# Altium PCB POLLUTAG.PcbDoc
Units mm, origin at the board's own origin, x right, y up, seen from the top; angles counter-clockwise.
Board outline 175 x 81 mm, 2 copper layers (Top Layer, Bottom Layer), stack 1.471 mm thick; 41 components, 28 nets, 141 pads, 0 vias.
Unrouted connection lines stored in the file: 90.
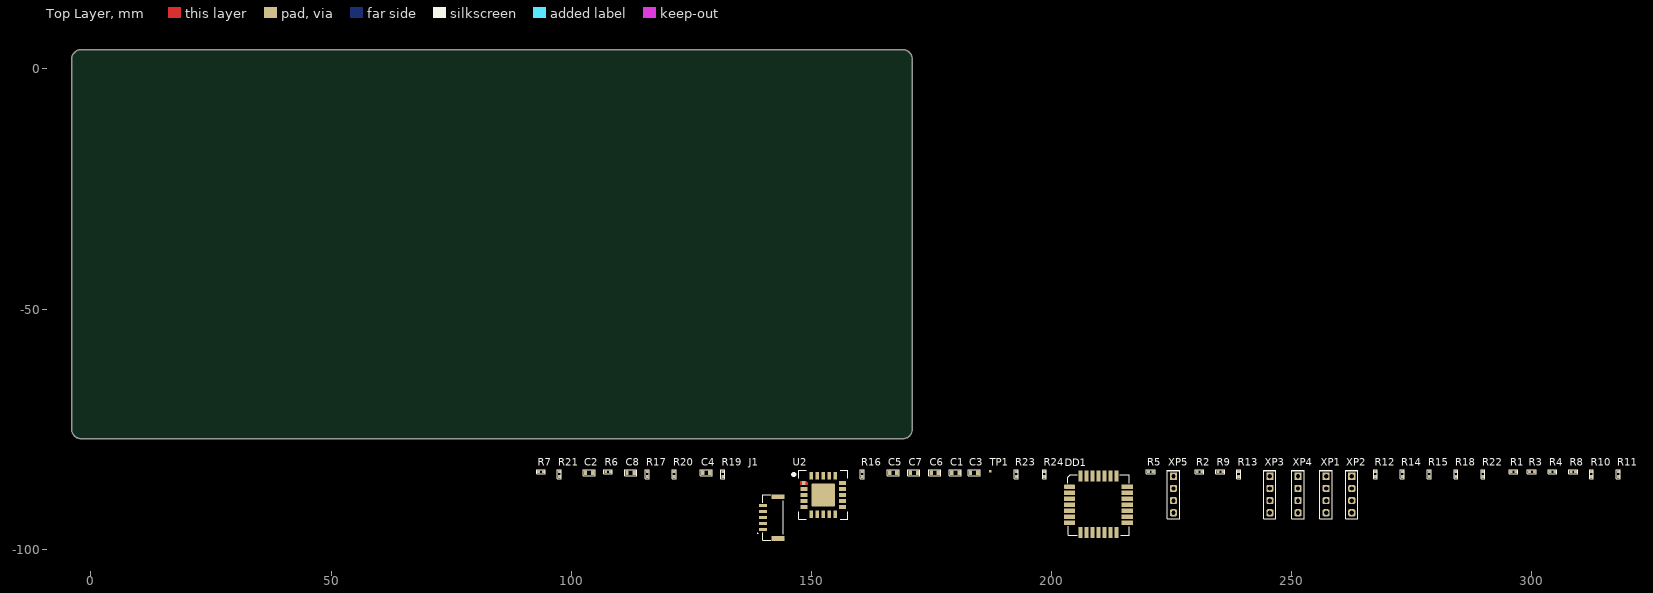
[diagram p0: Top Layer view]
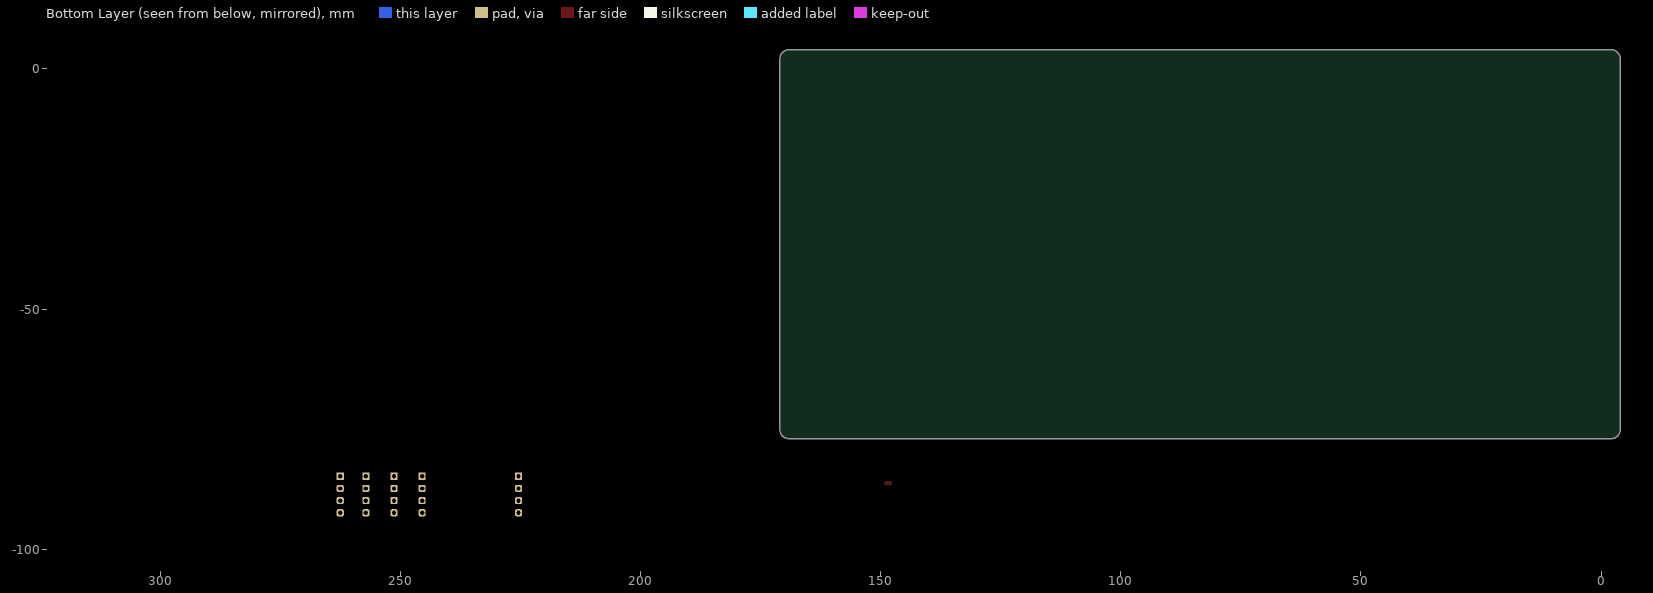
[diagram p1: Bottom Layer view, seen from below]

## Layer stack, top to bottom
Top Solder: solder mask 0.0102, Solder Resist, Dk 3.5
Top Layer: signal copper 0.0356
Dielectric 1: dielectric 1.4, FR-4, Dk 4.8
Bottom Layer: signal copper 0.0356
Bottom Solder: solder mask 0.0102, Solder Resist, Dk 3.5

## Board outline
-2,-77 cw(c-2,-75) -4,-75 -4,2 cw(c-2,2) -2,4 169,4 cw(c169,2) 171,2 171,-75 cw(c169,-75) 169,-77

## Design rules (kind name [scope] priority, off if disabled: settings)
Clearance Clearance_1 [InPolygon] p1: gap=0.25 ignorepadtopadclearanceinfootprint=FALSE except(0: Arc-Hole Track-Hole SMDPad-Hole THPad-Hole Via-Hole Fill-Hole Poly-Hole Region-Hole Text-Hole)
Clearance [All] p2: gap=0.152 ignorepadtopadclearanceinfootprint=FALSE except(0: Arc-Hole Track-Hole SMDPad-Hole THPad-Hole Via-Hole Fill-Hole Poly-Hole Region-Hole Text-Hole)
HoleSize [All] p1: absolutevalues=TRUE maxlimit=10 minlimit=0.025 maxpercent=80.000 minpercent=20.000
HoleToHoleClearance [All] p1: gap=0.2 allowstackedmicrovias=TRUE
MinimumSolderMaskSliver [All] p1 off: minsoldermaskwidth=0.254
PlaneClearance [All] p1: clearance=0.25
PolygonConnect [(InNet('AVDD_DISP') AND IsPolygon)] p1: connectstyle=Direct reliefconductorwidth=0.254 reliefentries=4 polygonreliefangle="90 Angle" airgapwidth=0.254
PolygonConnect TOP_NETDA2-14 [InNamedPolygon('NETDA2-14')] p2: connectstyle=Direct reliefconductorwidth=0.254 reliefentries=4 polygonreliefangle="90 Angle" airgapwidth=0.254
PolygonConnect Bottom_GND [isVia vs InNet('GND')] p3: connectstyle=Direct reliefconductorwidth=0.254 reliefentries=4 polygonreliefangle="90 Angle" airgapwidth=0.254
PolygonConnect PolygonConnect_2 [All] p4: connectstyle=Relief reliefconductorwidth=0.254 reliefentries=4 polygonreliefangle="90 Angle" airgapwidth=0.254
PolygonConnect PolygonConnect_1 [isVia] p5: connectstyle=Direct reliefconductorwidth=0.254 reliefentries=4 polygonreliefangle="90 Angle" airgapwidth=0.254
RoomDefinition POLLLUTAG_1 [InComponentClass('POLLLUTAG_1')] p1: confinementstyle=ConfineIn formatcopy=TRUE lockcomponents=FALSE outline 91.514,-106.176 320.4,-106.176 320.4,-83.35 91.514,-83.35
RoutingVias [All] p1: holewidth=0.3 width=0.7 viastyle="Through Hole" minholewidth=0.3 minwidth=0.7 maxholewidth=5 maxwidth=7
SilkToBoardRegionClearance [All] p1 off:
SilkToSilkClearance [All] p1 off: silktosilkclearance=0.254
SilkToSolderMaskClearance [IsPad] p1 off: minsilkscreentomaskgap=0.254 clearancetoexposedcopper=TRUE
SolderMaskExpansion [All] p1: expansion=0.102 istentingtop=FALSE
Width [All] p1: maxlimit=8 minlimit=0.15 preferedwidth=0.2
23 further rules are at their usual default settings.

## Components (designator, comment, footprint, x,y, rotation, side; value= is the part's Value field where it differs from the comment)
C1 "1uF" CAP_0603 179.993,-84.075 r0 top
C2 "1uF" CAP_0603 103.715,-84.075 r0 top
C3 "1uF" CAP_0603 183.868,-84.075 r0 top
C4 "1uF" CAP_0603 128.116,-84.075 r0 top
C5 "15pF" CAP_0603 167.043,-84.075 r0 top value=1uF
C6 "15pF" CAP_0603 175.668,-84.075 r0 top value=1uF
C7 "15pF" CAP_0603 171.343,-84.075 r0 top value=1uF
C8 "1uF" CAP_0603 112.365,-84.075 r0 top
DD1 "LoRa-E5-HF" LCC28_1.25_7X7 203.754,-87.004 r0 top
J1 "SM05B-GHS-TB_LF__SN_" SM05B-GHS-TB 140.091,-93.425 r90 top
R1 "Res_0402" RES_0402 296.649,-83.875 r0 top value=100
R2 "Res_0402" RES_0402 231.321,-83.875 r0 top value=100
R3 "Res_0402" RES_0402 300.474,-83.875 r0 top value=4.7k
R4 "Res_0402" RES_0402 304.774,-83.875 r0 top value=4.7k
R5 "Res_0402" RES_0402 221.145,-83.875 r0 top value=4.7k
R6 "Res_0402" RES_0402 108.19,-83.875 r0 top value=100
R7 "Res_0402" RES_0402 94.214,-83.875 r0 top value=100
R8 "Res_0402" RES_0402 309.1,-83.875 r0 top value=100
R9 "Res_0402" RES_0402 235.621,-83.875 r0 top value=100
R10 "Res_0402" RES_0402 312.4,-83.875 r90 top value=4.7k
R11 "Res_0402" RES_0402 318,-83.875 r90 top value=4.7k
R12 "Res_0402" RES_0402 267.423,-83.875 r90 top value=100
R13 "Res_0402" RES_0402 238.946,-83.875 r90 top value=100
R14 "Res_0402" RES_0402 273.023,-83.875 r90 top value=4.7k
R15 "Res_0402" RES_0402 278.623,-83.875 r90 top value=4.7k
R16 "Res_0402" RES_0402 160.592,-83.875 r90 top value=100
R17 "Res_0402" RES_0402 115.815,-83.875 r90 top value=100
R18 "Res_0402" RES_0402 284.198,-83.875 r90 top value=4.7k
R19 "Res_0402" RES_0402 131.566,-83.875 r90 top value=100
R20 "Res_0402" RES_0402 121.415,-83.875 r90 top value=100
R21 "Res_0402" RES_0402 97.539,-83.875 r90 top value=100
R22 "Res_0402" RES_0402 289.799,-83.875 r90 top value=4.7k
R23 "Res_0402" RES_0402 192.669,-83.875 r90 top value=4.7k
R24 "Res_0402" RES_0402 198.519,-83.875 r90 top value=4.7k
TP1 "JUMPER" "TEST POINT" 187.219,-82.775 r90 top value=JMP
U2 "SCD4x" SCD4X 152.467,-88.7 r0 top
XP1 "LPUART1" CONN_2.54_4 257.147,-84.8 r0 top
XP2 "UART1" CONN_2.54_4 262.497,-84.8 r0 top
XP3 "USART2" CONN_2.54_4 245.446,-84.8 r0 top
XP4 "I2C2" CONN_2.54_4 251.297,-84.8 r0 top
XP5 "SPI2" CONN_2.54_4 225.37,-84.8 r0 top

## Footprints (in the part's own frame and the unit in brackets; to place one, negate y for a bottom-side part, rotate by r counter-clockwise, add the part's x,y. Pads: shape width x height; smd on the part's side, far side on the other; paste and mask are expansions set on the pad)
CAP_0603 [mm]
  rect 0.7x0.9 smd: 1(-0.75,0) 2(0.75,0)
  silkscreen extent -1.25,-0.6 1.25,0.6, body extent -0.8,-0.4 0.8,0.4, height 0.8
CONN_2.54_4 [mm]
  rect 1.5x1.5 hole 0.9: 1(0,0)
  rrect50% 1.5x1.5 hole 0.9: 2(0,-2.54) 3(0,-5.08) 4(0,-7.62)
  silkscreen extent -1.27,-8.89 1.27,1.27
LCC28_1.25_7X7 [mm]
  rrect50% 2.3x0.9 smd: 1(0,0)
  rect 2.3x0.9 smd: 2(0,-1.25) 3(0,-2.5) 4(0,-3.75) 5(0,-5) 6(0,-6.25) 7(0,-7.5) 15(12,-7.5) 16(12,-6.25) 17(12,-5) 18(12,-3.75) 19(12,-2.5) 20(12,-1.25) 21(12,0)
  rect 0.9x2.3 smd: 8(2.25,-9.5) 9(3.5,-9.5) 10(4.75,-9.5) 11(6,-9.5) 12(7.25,-9.5) 13(8.5,-9.5) 14(9.75,-9.5) 22(9.75,2.25) 23(8.5,2.25) 24(7.25,2.25) 25(6,2.25) 26(4.75,2.25) 27(3.5,2.25) 28(2.25,2.25)
  silkscreen extent -0.35,-10.05 12.37,2.5, body extent 0.05,-9.77 12.05,2.23, height 2.6
RES_0402 [mm] "RES and IND"
  rrect20% 0.6x0.6 smd: 1(-1,0) 2(0,0)
  silkscreen extent -1.4,-0.4 0.4,0.4, body extent -1,-0.25 0,0.25, height 0.3
SCD4X [mm] "PQFN, 20-Leads, Body 10.10x10.10mm, Pitch 1.25mm, Thermal Pad 4.80x4.80mm, IPC Medium Density"
  rect 0.8x0.8 smd paste-0.7: 1(-4.075,2.5)
  rrect5% 1.5x0.8 smd paste-0.125: 2(-4,1.25) 3(-4,0) 4(-4,-1.25) 5(-4,-2.5) 11(4,-2.5) 12(4,-1.25) 13(4,0) 14(4,1.25) 15(4,2.5)
  rrect5% 0.8x1.5 smd paste-0.125: 6(-2.5,-4) 7(-1.25,-4) 8(0,-4) 9(1.25,-4) 10(2.5,-4) 16(2.5,4) 17(1.25,4) 18(0,4) 19(-1.25,4) 20(-2.5,4)
  rrect5% 4.8x4.8 smd paste-5 mask+0.1: 21(0,0)
  Top Layer region: -4.75,2.1 -4.75,2.9 -3.5,2.9 -3.25,2.65 -3.25,2.1
  silkscreen extent -6.65,-5.1 5.1,5.1, body extent -5.05,-5.05 5.05,5.05, height 6.28
SM05B-GHS-TB [mm]
  rect 0.6x1.7 smd: 1(-2.5,0.2) 2(-1.25,0.2) 3(0,0.2) 4(1.25,0.2) 5(2.5,0.2)
  rect 1x2.7 smd: 6(-4.35,-3) 7(4.35,-3)
  silkscreen extent -4.75,-4.05 4.75,1.32, body extent -10,-3.38 10,3.38, height 5.8
"TEST POINT" [mm] "TEST POINT"
  rrect40% 0.5x0.5 smd: 1(-1,0)

## Part data
C1 C2 C3 C4 C5 C6 C7 C8: library part Cap_0603, Manufacturer=AVX, Part Number=0603YC105KAT2A, Distributor=http://www.rospek.ru, PackageReference=0603, Price=3.00, Replacement=GRM188R71E105KA12D
DD1: library part "LoRa-E5 Seeed", "LoRa Wireless Module - Powered by STM32WE"
J1: "JST GH Series, 1.25mm Pitch 5 Way Right Angle PCB Header, Solder Termination, 1A", Arrow Part Number=SM05B-GHS-TB(LF)(SN), Manufacturer_Name="JST (JAPAN SOLDERLESS TERMINALS)", Arrow Price/Stock=https://www.arrow.com/en/products/sm05b-ghs-tb-lf-sn/jst-manufacturing, Datasheet Link=https://datasheet.datasheetarchive.com/originals/distributors/Datasheets_SAMA/e4ef010dc292ea31091454f6c0afb63a.pdf, Manufacturer_Part_Number=SM05B-GHS-TB(LF)(SN)
R1 R2 R3 R4 R5 R6 R7 R8 R9 R10 R11 R12 R13 R14 R15 R16 R17 R18 R19 R20 R21 R22 R23 R24: "0402", Manufacturer=BOURNS, Part Number=CR0402-FX-1000GLF, Distributor=http://www.kontest.ru, PackageReference=0402, Price=0.01$, Replacement="0402 100 Ohm 5%"
TP1: library part TEST_POINT_SMALL, "JUMPER 2.54", Manufacturer=TE, Price=0.05$
XP1 XP2 XP3 XP4 XP5: library part CONNECT_SWD

## Nets (pads, with @x,y where several pads share a name; then routed paths per layer and width w, separated by ;. In a path a pad name is that pad's centre, name@x,y a point inside that pad or via, vN(x,y) a via of type N, cw(c..) or ccw(c..) an arc to the next point about the centre after c; other vN are vias at no path point)
+5VDC: C8.2 J1.5
GND: C1.1 C2.1 C3.1 C4.1 C5.1 C6.1 C7.1 C8.1 DD1.2 DD1.14 DD1.16 DD1.22 J1.4 U2.6 U2.20 U2.21 XP1.4 XP2.4 XP3.4 XP4.4
I2C2_SCL: DD1.5 R6.1 R16.1 R21.1 R22.2 XP4.2
I2C2_SDA: DD1.6 R7.1 R17.1 R18.2 R20.1 XP4.1
LPUART1_RX: DD1.13 R2.1 R4.2 XP1.2
LPUART1_TX: DD1.12 R1.2 R3.2 XP1.1
NetDD1_15: DD1.15 TP1.1
NetJ1_1: J1.1 R19.2
NetJ1_2: J1.2 R20.2
NetJ1_3: J1.3 R21.2
NetR6_2: R6.2
NetR7_2: R7.2
NetR16_2: R16.2 U2.9
NetR17_2: R17.2 U2.10
RST: C5.2 DD1.17 R5.2
RXD_PC: R1.1 R8.1 R12.1 R24.2
SPI2_MISO: DD1.26 XP5.1
SPI2_MOSI: DD1.27 XP5.2
SPI2_NSS: DD1.25 XP5.4
SPI2_SCK: DD1.24 XP5.3
SWCLK: C6.2 DD1.4
SWDIO: C7.2 DD1.3
TXD_PC: R2.2 R9.2 R13.2 R23.2
UART1_RX: DD1.9 R9.1 R11.2 R19.1 XP2.2
UART1_TX: DD1.10 R8.2 R10.2 XP2.1
USART2_RX: DD1.18 R13.1 R15.2 XP3.2
USART2_TX: DD1.19 R12.2 R14.2 XP3.1
VCC: C1.2 C2.2 C3.2 C4.2 DD1.1 R3.1 R4.1 R5.1 R10.1 R11.1 R14.1 R15.1 R18.1 R22.1 R23.1 R24.1 U2.7 U2.19 XP1.3 XP2.3 XP3.3 XP4.3
pads on no net: DD1.7 DD1.8 DD1.11 DD1.20 DD1.21 DD1.23 DD1.28 J1.6 J1.7 U2.1 U2.2 U2.3 U2.4 U2.5 U2.8 U2.11 U2.12 U2.13 U2.14 U2.15 U2.16 U2.17 U2.18